# Altium PCB PCB1.PcbDoc
Units mil, origin at the board's own origin, x right, y up, seen from the top; angles counter-clockwise.
Board outline 4500 x 3000 mil, 4 copper layers (Top Layer, GND, Power Plane, Bottom Layer), stack 58 mil thick; 52 components, 53 nets, 188 pads, 2 vias.
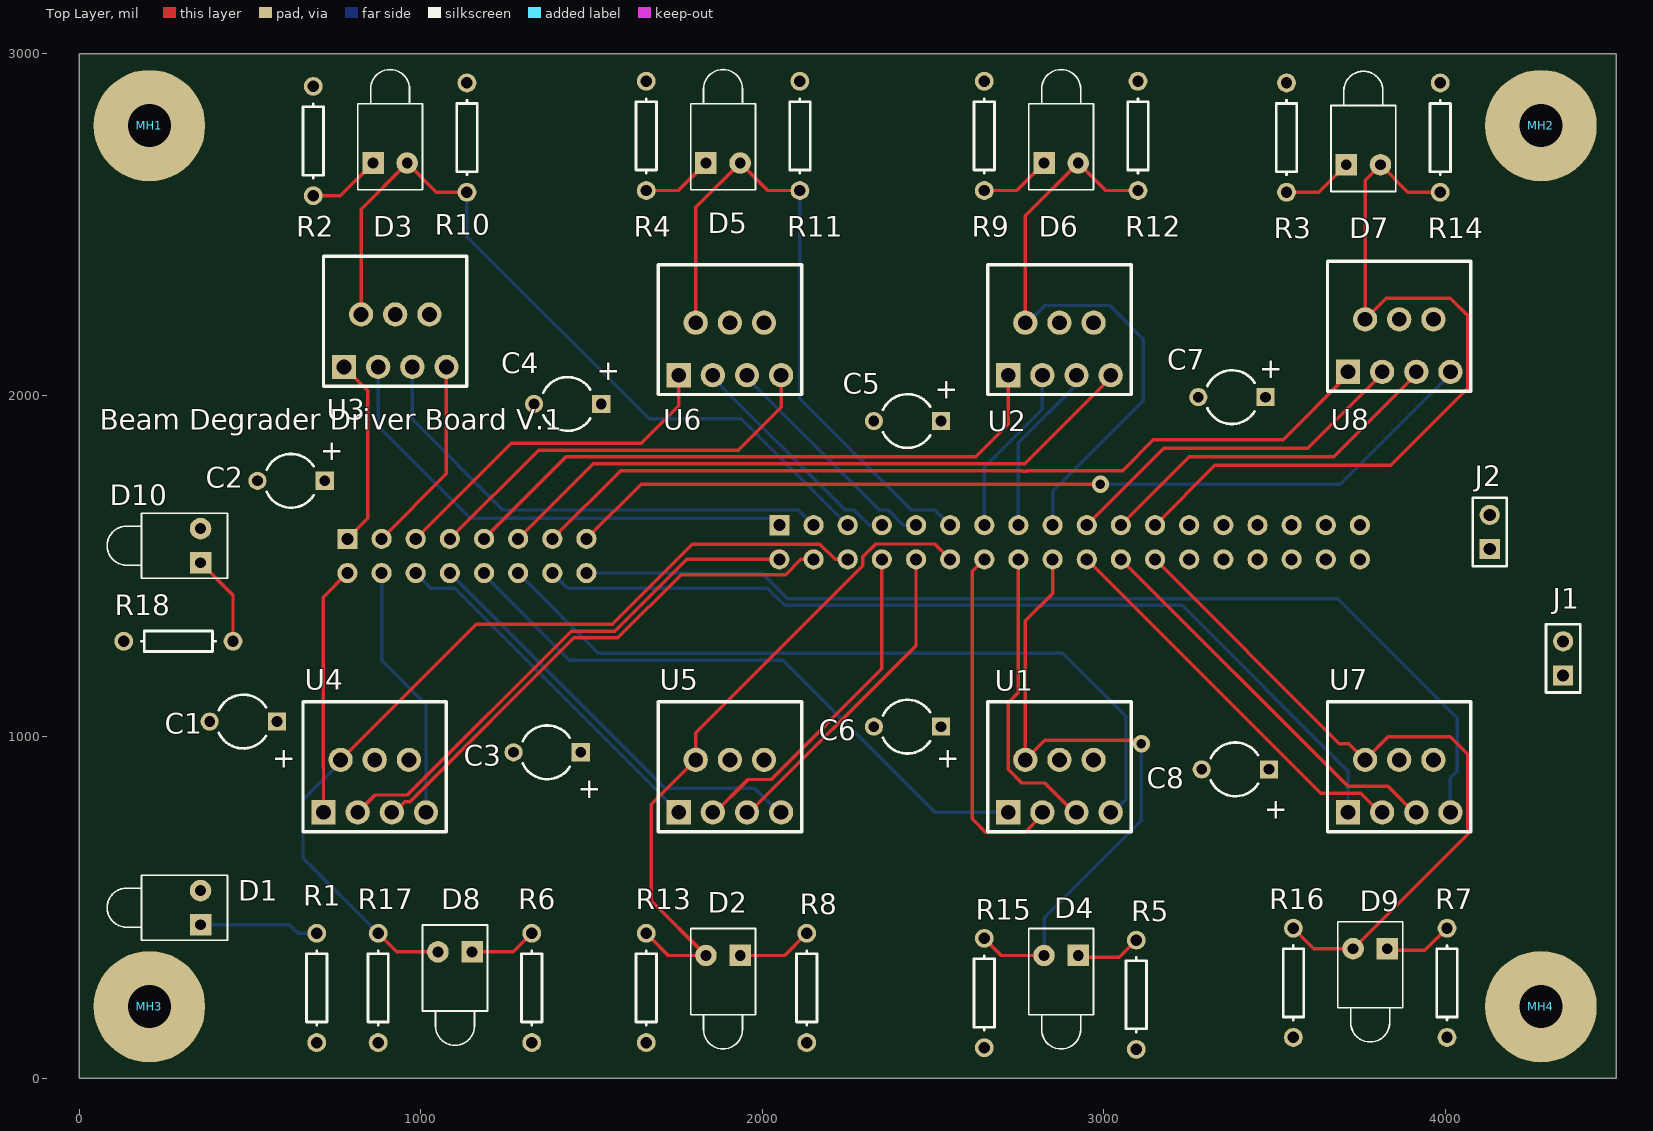
[diagram p0: Top Layer view]
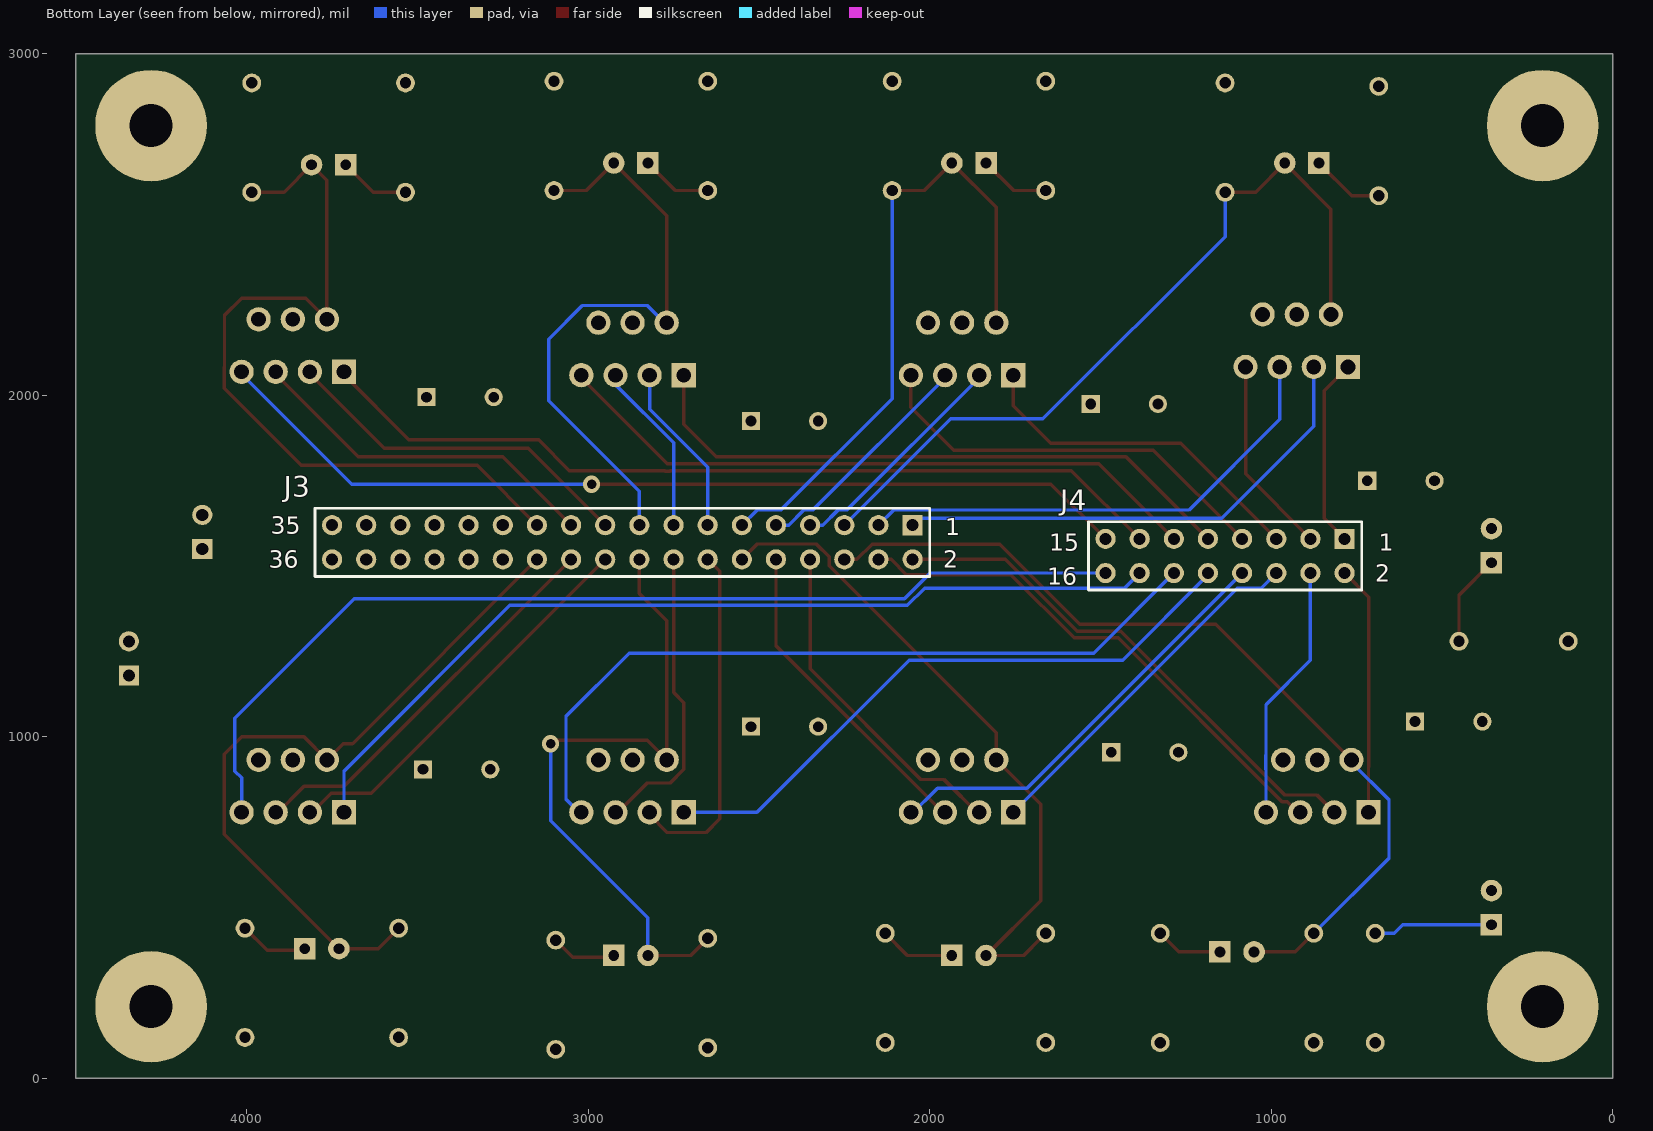
[diagram p1: Bottom Layer view, seen from below]
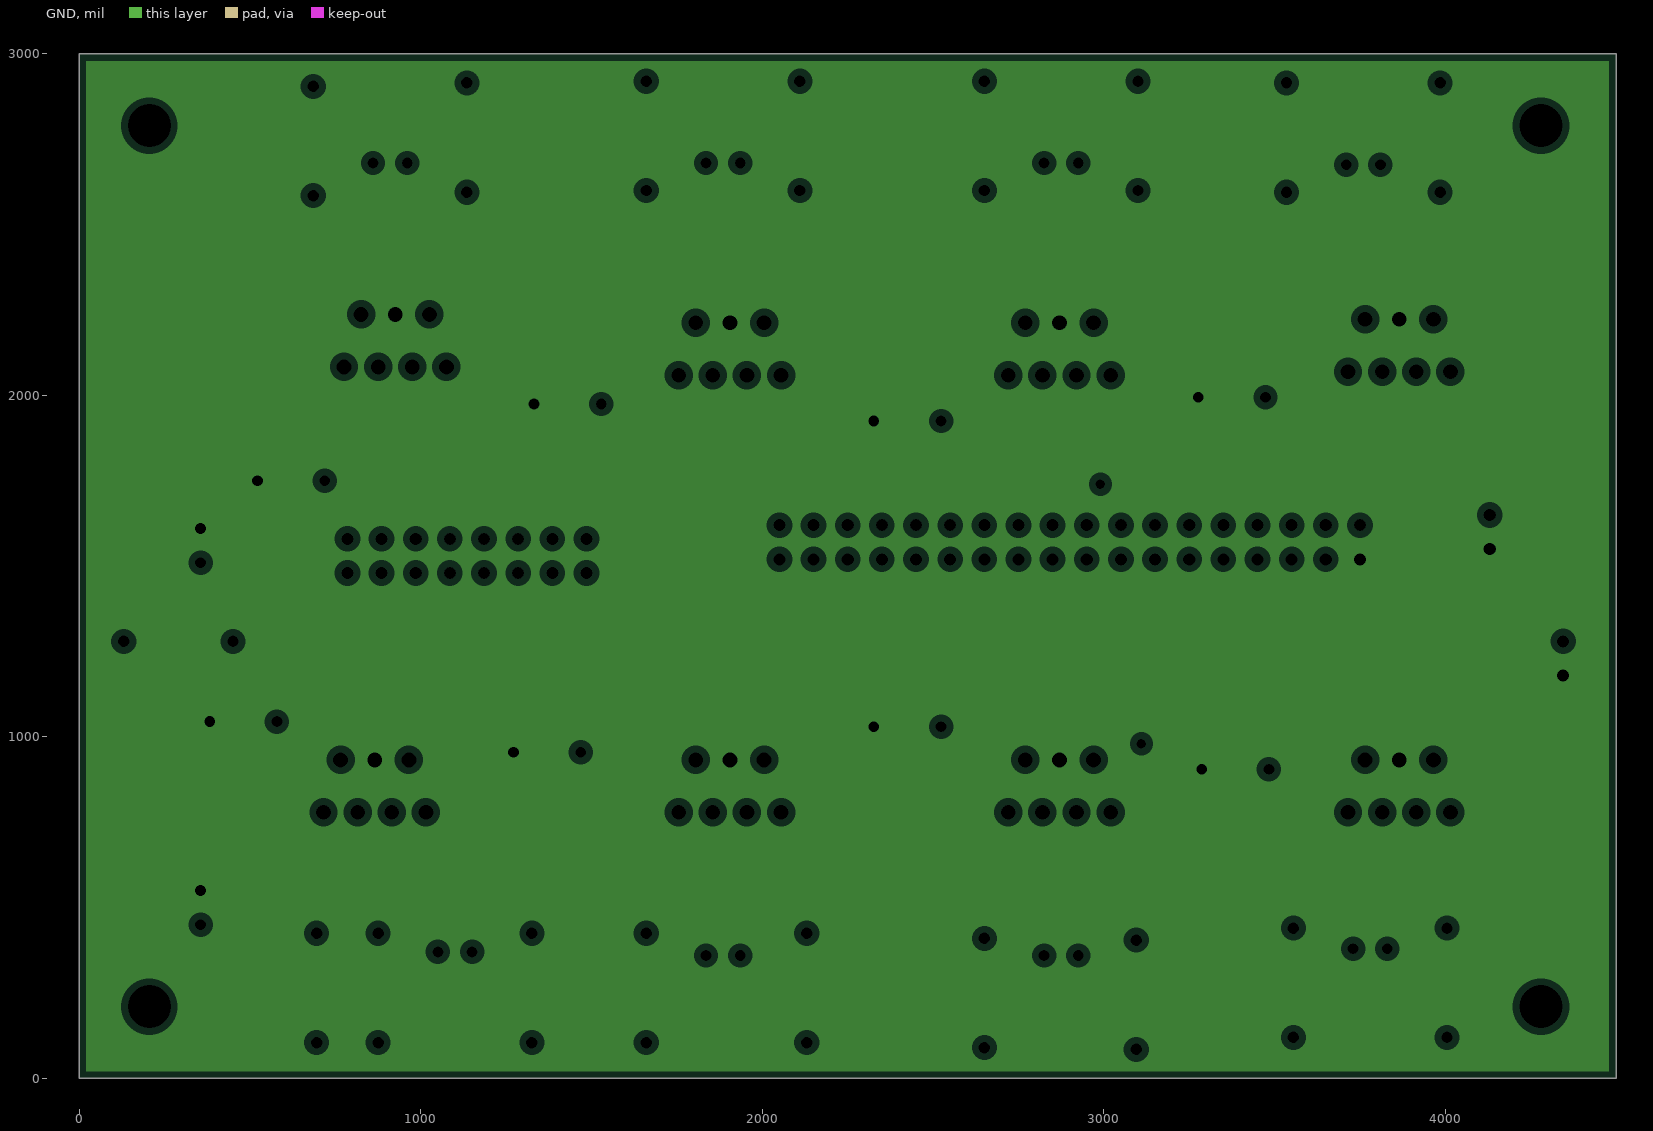
[diagram p2: GND, clearances drawn from the general rule]
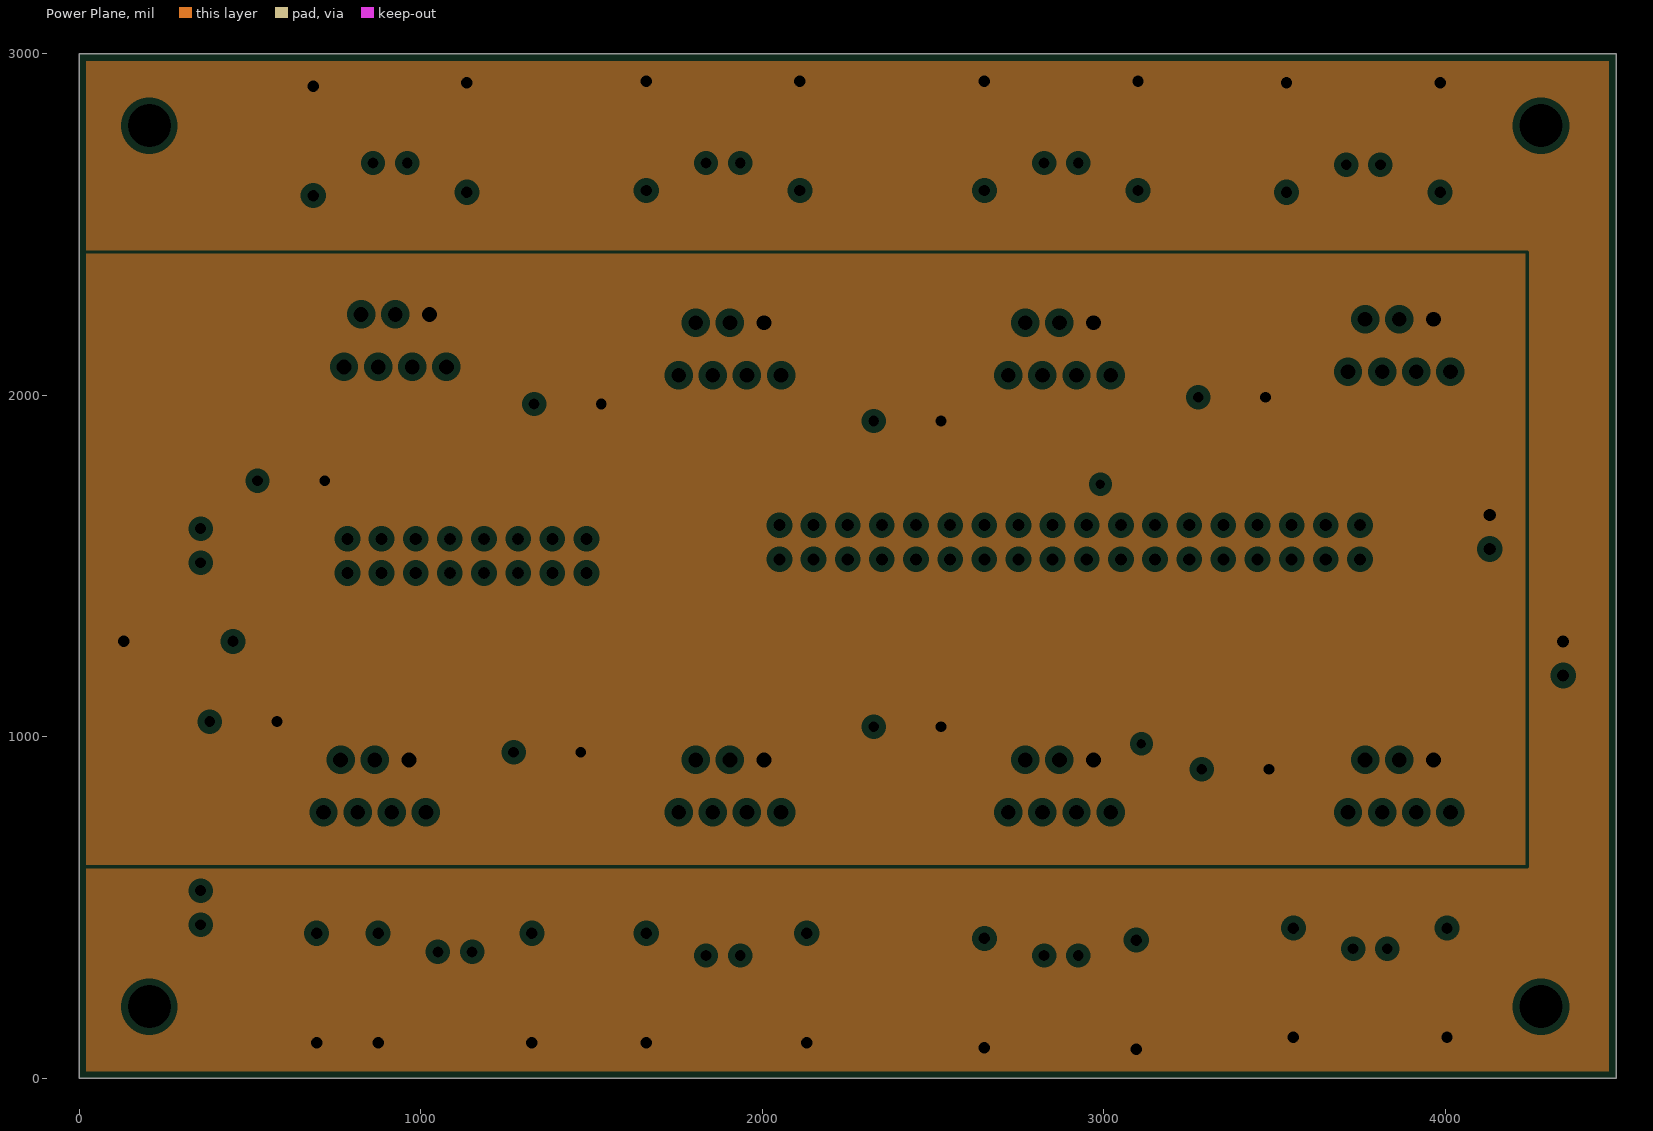
[diagram p3: Power Plane, clearances drawn from the general rule]

## Layer stack, top to bottom
Top Solder: solder mask 0.4, Solder Resist, Dk 3.5
Top Layer: signal copper 1.7
Dielectric 1: prepreg 11.9, FR-4, Dk 4.2
GND: plane copper 1.4, net GND
Dielectric 3: core 28, Dk 4.2
Power Plane: plane copper 1.4, net (Multiple Nets)
Dielectric 2: prepreg 11.9, Dk 4.2
Bottom Layer: signal copper 1.7
Bottom Solder: solder mask 0.4, Solder Resist, Dk 3.5

## Board outline
0,0 4500,0 4500,3000 0,3000

## Design rules (kind name [scope] priority, off if disabled: settings)
AcuteAngle [All] p1: minimum=1.20000000000000E+0002 checktracksonly=TRUE
Clearance [All] p1: gap=10
HoleSize [All] p1: absolutevalues=TRUE maxlimit=200 minlimit=1 maxpercent=80.000 minpercent=20.000
PlaneClearance [All] p1: clearance=20
PlaneConnect [All] p1: planeconnectstyle=Relief reliefexpansion=20 reliefentries=4 reliefconductorwidth=20 reliefairgap=10
PolygonConnect [All] p1: connectstyle=Relief reliefconductorwidth=10 reliefentries=4 polygonreliefangle="90 Angle" airgapwidth=10
RoutingVias [All] p1: holewidth=28 width=50 viastyle="Through Hole" minholewidth=28 minwidth=50 maxholewidth=28 maxwidth=50
SolderMaskExpansion [All] p1: expansion=4
Width [All] p1: maxlimit=10 minlimit=10 preferedwidth=10
27 further rules are at their usual default settings.

## Components (designator, comment, footprint, x,y, rotation, side; value= is the part's Value field where it differs from the comment)
C1 "Cap1" CAPR5-4X5 480,1045 r180 top
C2 "Cap1" CAPR5-4X5 620,1750 r180 top
C3 "Cap2" CAPR5-4X5 1370,955 r180 top
C4 "Cap2" CAPR5-4X5 1430,1975 r180 top
C5 "Cap2" CAPR5-4X5 2425,1925 r180 top
C6 "Cap2" CAPR5-4X5 2425,1030 r180 top
C7 "Cap1" CAPR5-4X5 3375,1995 r180 top
C8 "Cap1" CAPR5-4X5 3385,905 r180 top
D1 "GREEN LED" LED-1 355,500 r180 top
D2 "RED LED" LED-1 1885,360 r270 top
D3 "RED LED" LED-1 910,2680.61 r90 top
D4 "RED LED" LED-1 2875,360 r270 top
D5 "RED LED" LED-1 1885,2680.61 r90 top
D6 "RED LED" LED-1 2875,2680.61 r90 top
D7 "RED LED" LED-1 3760,2675.61 r90 top
D8 "RED LED" LED-1 1100,370.49 r270 top
D9 "RED LED" LED-1 3780,380 r270 top
D10 "GREEN LED" LED-1 355,1560 r180 top
J1 "3.3V PS" HDR1X2 4345,1180 r90 top
J2 "12V PS" HDR1X2 4130,1550 r90 top
J3 "Header 18X2" HDR2X18 2050,1620 r0 bottom
J4 "Header 8X2" HDR2X8 785,1580 r0 bottom
MH1 "4-40" MountHole4-40 205,2790 r0 top
MH2 "4-40" MountHole4-40 4280,2790 r0 top
MH3 "4-40" MountHole4-40 205,210 r0 top
MH4 "4-40" MountHole4-40 4280,210 r0 top
R1 "Res2" AXIAL-0.3 695,265 r270 top
R2 "Res2" AXIAL-0.3 685,2745 r90 top
R3 "Res2" AXIAL-0.3 3535,2755 r90 top
R4 "Res2" AXIAL-0.3 1660,2760 r90 top
R5 "Res2" AXIAL-0.3 3095,245 r270 top
R6 "Res2" AXIAL-0.3 1325,265 r270 top
R7 "Res2" AXIAL-0.3 4005,280 r270 top
R8 "Res2" AXIAL-0.3 2130,265 r270 top
R9 "Res2" AXIAL-0.3 2650,2760 r90 top
R10 "Res1" AXIAL-0.3 1135,2755 r90 top
R11 "Res1" AXIAL-0.3 2110,2760 r90 top
R12 "Res1" AXIAL-0.3 3100,2760 r90 top
R13 "Res1" AXIAL-0.3 1660,265 r270 top
R14 "Res1" AXIAL-0.3 3985,2755 r90 top
R15 "Res1" AXIAL-0.3 2650,250 r270 top
R16 "Res1" AXIAL-0.3 3555,280 r270 top
R17 "Res1" AXIAL-0.3 875,265 r270 top
R18 "Res3" AXIAL-0.3 290,1280 r180 top
U1 "TLE 5206-2S" "TLE 5206-2" 2660,722.83 r0 top
U2 "TLE 5206-2S" "TLE 5206-2" 2660,2002.83 r0 top
U3 "TLE 5206-2S" "TLE 5206-2" 715,2027.17 r0 top
U4 "TLE 5206-2S" "TLE 5206-2" 655,722.83 r0 top
U5 "TLE 5206-2S" "TLE 5206-2" 1695,722.83 r0 top
U6 "TLE 5206-2S" "TLE 5206-2" 1695,2002.83 r0 top
U7 "TLE 5206-2S" "TLE 5206-2" 3655,722.83 r0 top
U8 "TLE 5206-2S" "TLE 5206-2" 3655,2012.83 r0 top

## Footprints (in the part's own frame and the unit in brackets; to place one, negate y for a bottom-side part, rotate by r counter-clockwise, add the part's x,y. Pads: shape width x height; smd on the part's side, far side on the other; paste and mask are expansions set on the pad)
AXIAL-0.3 [mm] "Axial Device, Thru-Hole; 2 Leads; 0.3 in Pin Spacing"
  round 1.4 hole 0.85: 1(-4.064,0) 2(4.064,0)
  silkscreen extent -2.77,-0.76 2.77,0.76
CAPR5-4X5 [mm] "Capacitor; 2 Leads"
  rect 1.35x1.35 hole 0.8: 1(-2.5,0)
  round 1.35 hole 0.8: 2(2.5,0)
  silkscreen extent -1.69,-2 1.82,2
HDR1X2 [mm] "Connector; Header; 2 Position"
  rect 1.5x1.5 hole 0.9: 1(0,0)
  round 1.5 hole 0.9: 2(2.54,0)
  silkscreen extent -1.27,-1.27 3.81,1.27
HDR2X8 [mm] "Connector; Header; 8x2 Position"
  rect 1.5x1.5 hole 0.9: 1(0,0)
  round 1.5 hole 0.9: 2(0,2.54) 3(2.54,0) 4(2.54,2.54) 5(5.08,0) 6(5.08,2.54) 7(7.62,0) 8(7.62,2.54) 9(10.16,0) 10(10.16,2.54) 11(12.7,0) 12(12.7,2.54) 13(15.24,0) 14(15.24,2.54) 15(17.78,0) 16(17.78,2.54)
  silkscreen extent -1.27,-1.27 19.05,3.81
HDR2X18 [mm] "Connector; Header; 18x2 Position"
  rect 1.5x1.5 hole 0.9: 1(0,0)
  round 1.5 hole 0.9: 2(0,2.54) 3(2.54,0) 4(2.54,2.54) 5(5.08,0) 6(5.08,2.54) 7(7.62,0) 8(7.62,2.54) 9(10.16,0) 10(10.16,2.54) 11(12.7,0) 12(12.7,2.54) 13(15.24,0) 14(15.24,2.54) 15(17.78,0) 16(17.78,2.54) 17(20.32,0) 18(20.32,2.54) 19(22.86,0) 20(22.86,2.54) 21(25.4,0) 22(25.4,2.54) 23(27.94,0) 24(27.94,2.54) 25(30.48,0) 26(30.48,2.54) 27(33.02,0) 28(33.02,2.54) 29(35.56,0) 30(35.56,2.54) 31(38.1,0) 32(38.1,2.54) 33(40.64,0) 34(40.64,2.54) 35(43.18,0) 36(43.18,2.54)
  silkscreen extent -1.27,-1.27 44.45,3.81
LED-1 [mm] "LED; 2 Leads"
  rect 1.6x1.6 hole 0.8: 1(0,1.27)
  round 1.6 hole 0.8: 2(0,-1.27)
  silkscreen extent -2,-2.41 6.95,2.41
MountHole4-40 [mm]
  round 8.3 / inner round 3.7 / far side round 8.3 hole 3.2: 1(0,0)
"TLE 5206-2" [mm] "H-bridge bent legs"
  rect 1.8x1.8 hole 1.1: 1(1.524,1.434)
  round 1.8 hole 1.1: 2(2.794,5.334) 3(4.064,1.434) 4(5.334,5.334) 5(6.604,1.434) 6(7.874,5.334) 7(9.144,1.434)
  silkscreen extent 0,0 10.67,9.65

## Part data
C1 C2 C7 C8: library part Cap2, "Capacitor"
C3 C4 C5 C6: "Capacitor"
D1 D2 D3 D4 D5 D6 D7 D8 D9 D10: library part LED1, "Typical RED GaAs LED"
J1 J2: library part "Header 2", "Header, 2-Pin"
J3: "Header, 18-Pin, Dual row"
J4: "Header, 8-Pin, Dual row"
MH1 MH2 MH3 MH4: library part "Mounting Hole 4-40"
R1 R2 R3 R4 R5 R6 R7 R8 R9 R18: library part Res1, "Resistor"
R10 R11 R12 R13 R14 R15 R16 R17: "Resistor"
U1 U2 U3 U4 U5 U6 U7 U8: "Infineon TLE 5206-2S Hbridge"

## Via types
v1: diameter 50, hole 28, Top Layer to Bottom Layer, 2 vias

## Nets (pads, with @x,y where several pads share a name; then routed paths per layer and width w, separated by ;. In a path a pad name is that pad's centre, name@x,y a point inside that pad or via, vN(x,y) a via of type N, cw(c..) or ccw(c..) an arc to the next point about the centre after c; other vN are vias at no path point)
GND: C1.2 C2.2 C3.2 C4.2 C5.2 C6.2 C7.2 C8.2 D1.2 D10.2 J1.1 J2.1 J3.36 U1.4 U2.4 U3.4 U4.4 U5.4 U6.4 U7.4 U8.4
H1_EF: D3.2 J3.5 R10.1 U3.2 | length 2333.2
  Top Layer w10: U3.2@825,2230 U3.2 825,2545.61 D3.2 1045.61,2595 1120,2595 R10.1@1135,2610
  Bottom Layer w10: R10.1@1135,2610 R10.1 1135,2465 1668.43,1931.57 1938.43,1931.57 J3.5
H1_IN1: J3.1 U3.3 | length 1461.6
  Bottom Layer w10: U3.3@875,2076.46 875,1910 1145,1640 2030,1640 J3.1
H1_IN2: J3.3 U3.5 | length 1449.9
  Bottom Layer w10: U3.5@975,2076.46 975,1930 1240.47,1664.53 2105.47,1664.53 J3.3
H1_OUT1: J4.1 U3.1 | length 557.5
  Top Layer w10: U3.1 845,2013.62 845,1640 J4.1
H1_OUT2: J4.3 U3.7 | length 575.2
  Top Layer w10: J4.3 1075,1770 U3.7@1075,2076.46
H2_EF: D5.2 J3.11 R11.1 U6.2 | length 1954.6
  Top Layer w10: U6.2@1805,2205.67 U6.2 1805,2550.61 D5.2 2015.61,2600 2100,2600 R11.1@2110,2610
  Bottom Layer w10: R11.1@2110,2610 R11.1 2110,1990 2435.47,1664.53 2505.47,1664.53 J3.11
H2_IN1: J3.7 U6.3 | length 674
  Bottom Layer w10: U6.3@1855,2052.13 2242.6,1664.53 2268.44,1664.53 2312.97,1620 J3.7
H2_IN2: J3.9 U6.5 | length 674
  Bottom Layer w10: U6.5@1955,2052.13 2342.6,1664.53 2368.44,1664.53 2412.97,1620 J3.9
H2_OUT1: J4.5 U6.1 | length 1013.7
  Top Layer w10: J4.5 1265,1860 1645,1860 1755,1970 U6.1@1755,2052.13
H2_OUT2: J4.7 U6.7 | length 1216.6
  Top Layer w10: J4.7 1345,1840 1930,1840 2055,1965 U6.7@2055,2052.13
H3_EF: D6.2 J3.17 R12.1 U2.2 | length 1811.9
  Top Layer w10: U2.2@2770,2205.67 U2.2 2770,2525.61 D6.2 3005.61,2600 R12.1
  Bottom Layer w10: U2.2@2770,2205.67 2827.6,2263.27 3016.73,2263.27 3115,2165 3115,1985 2850,1720 J3.17
H3_IN1: J3.13 U2.3 | length 502.5
  Bottom Layer w10: J3.13 2650,1790 2820,1960 U2.3@2820,2052.13
H3_IN2: J3.15 U2.5 | length 502.5
  Bottom Layer w10: J3.15 2750,1861.72 2920,2031.72 U2.5@2920,2052.13
H3_OUT1: J4.9 U2.1 | length 1810.9
  Top Layer w10: J4.9 1425,1820 2625,1820 2720,1915 U2.1@2720,2052.13
H3_OUT2: J4.11 U2.7 | length 1930.6
  Top Layer w10: J4.11 1505,1800 2767.87,1800 U2.7@3020,2052.13
H4_EF: D7.2 J3.23 R14.1 U8.2 | length 2326
  Top Layer w10: J3.23 3325,1795 3840,1795 4065.43,2020.43 4065.43,2083.02 4065,2083.45 4065,2235 4015,2285 3827.17,2285 U8.2 3765,2630.61 D7.2 ; D7.2@3810.31,2675.3 3890.61,2595 3975,2595 R14.1@3985,2605
H4_IN1: J3.19 U8.3 | length 1048.6
  Top Layer w10: J3.19 3175,1845 3596.72,1845 U8.3@3815,2063.28
H4_IN2: J3.21 U8.5 | length 1048.1
  Top Layer w10: J3.21 3250,1820 3672.87,1820 U8.5@3915,2062.13
H4_OUT1: J4.13 U8.1 | length 2532.7
  Top Layer w10: J4.13 1585,1780 2759.59,1780 2761.66,1777.93 2774.09,1777.93 2776.16,1780 3055,1780 3145,1870 3525,1870 3715,2060 U8.1@3715,2062.13
H4_OUT2: J4.15 U8.7 | length 2729.7
  Top Layer w10: J4.15 1645,1740 v1(2990,1740)
  Bottom Layer w10: v1(2990,1740) 3692.87,1740 U8.7@4015,2062.13
H5_EF: D8.2 J3.6 R17.1 U4.2 | length 2607.2
  Top Layer w10: U4.2@765,925.67 U4.2 1162.17,1330 1560,1330 1794.53,1564.53 2168.44,1564.53 2212.97,1520 J3.6 ; R17.1 929.51,370.49 D8.2
  Bottom Layer w10: U4.2@765,925.67 655,815.67 655,645 R17.1
H5_IN1: J3.2 U4.3 | length 1549
  Top Layer w10: U4.3@815,772.13 U4.3 865.71,830 960,830 1440,1310 1568.28,1310 1778.28,1520 J3.2
H5_IN2: J3.4 U4.5 | length 1544.8
  Top Layer w10: U4.5@915,772.13 952.87,810 968.28,810 1448.28,1290 1576.57,1290 1762.04,1475.47 2068.44,1475.47 2112.97,1520 J3.4
H5_OUT1: J4.2 U4.1 | length 737.2
  Top Layer w10: U4.1@715,772.13 U4.1 715,911.51 714.57,911.94 714.57,1409.57 J4.2
H5_OUT2: J4.4 U4.7 | length 762.1
  Bottom Layer w10: J4.4 885,1225 1015,1095 1015,946.99 1015.43,946.56 1015.43,904.78 1015,904.35 U4.7 U4.7@1015,772.13
H6_EF: D2.2 J3.12 R13.1 U5.2 | length 1960.7
  Top Layer w10: R13.1@1675,410 1725,360 D2.2 1675,520 1675,802.83 U5.2 1805,1012.03 2294.53,1501.56 2294.53,1527.5 2332.03,1565 2505,1565 J3.12
H6_IN1: J3.8 U5.3 | length 992.6
  Top Layer w10: U5.3@1855,772.13 1958.11,875.24 2025.89,875.24 2350,1199.35 J3.8
H6_IN2: J3.10 U5.5 | length 952.9
  Top Layer w10: U5.5@1955,772.13 2450,1267.13 J3.10
H6_OUT1: J4.6 U5.1 | length 1074.5
  Bottom Layer w10: J4.6 1029.53,1435.47 1098.82,1435.47 U5.1 U5.1@1755,765
H6_OUT2: J4.8 U5.7 | length 1263.2
  Bottom Layer w10: J4.8 1715,850 1977.13,850 U5.7@2055,772.13
H7_EF: D4.2 J3.18 R15.1 U1.2 | length 1949.7
  Top Layer w10: R15.1@2650,395 2665,395 2700,360 2810,360 D4.2@2820.25,370.25 ; D4.2@2825,355 D4.2 ; J3.18 2850,1420 2770,1340 U1.2 2827.17,990 3100,990 v1(3110,980)
  Bottom Layer w10: D4.2 2825,470 3110,755 v1(3110,980) v1@3110,985 ; J3.18@2850,1495.47 J3.18
H7_IN1: J3.14 U1.3 | length 1017.7
  Top Layer w10: J3.14 2615,1485 2615,760 2655,720 2767.87,720 U1.3@2820,772.13
H7_IN2: J3.16 U1.5 | length 883.2
  Top Layer w10: J3.16 2750,1130 2719.57,1099.57 2719.57,904.78 2759.35,865 2827.13,865 U1.5@2920,772.13
H7_OUT1: J4.10 U1.1 | length 1831.1
  Bottom Layer w10: J4.10 1185,1475 1435,1225 2060,1225 2505.71,779.29 2712.83,779.29 U1.1@2720,772.13
H7_OUT2: J4.12 U1.7 | length 2260.5
  Bottom Layer w10: J4.12 1520,1245 2880,1245 3065,1060 3065,817.13 U1.7@3020,772.13
H8_EF: D9.2 J3.24 R16.1 U7.2 | length 2115.7
  Top Layer w10: J3.24 3690,980 3717.83,980 U7.2 3832.17,1000 4015,1000 4065.43,949.57 4065.43,715.43 D9.2 3615,380 R16.1
H8_IN1: J3.20 U7.3 | length 1174.8
  Top Layer w10: J3.20 3635,835 3752.13,835 U7.3@3815,772.13
H8_IN2: J3.22 U7.5 | length 1174.8
  Top Layer w10: J3.22 3715,855 3832.13,855 U7.5@3915,772.13
H8_OUT1: J4.14 U7.1 | length 2698.1
  Bottom Layer w10: J4.14 1429.53,1435.47 2014.99,1435.47 2065.46,1385 3230,1385 3715,900 U7.1 U7.1@3715,772.13
H8_OUT2: J4.16 U7.7 | length 3017.2
  Bottom Layer w10: J4.16 1998.74,1480 2073.74,1405 3685,1405 4035,1055 4035,900 4015,880 U7.7 U7.7@4015,772.13
NetD1_1: D1.1 R1.1 | length 354.5
  Bottom Layer w10: D1.1@355,440 365,450 615,450 640,425 R1.1
NetD2_1: D2.1 R8.1 | length 225.9
  Top Layer w10: D2.1@1935,350.49 1944.51,360 2065,360 R8.1
NetD3_1: D3.1 R2.1 | length 214.6
  Top Layer w10: R2.1 764.39,2585 D3.1
NetD4_1: D4.1 R5.1 | length 184.5
  Top Layer w10: D4.1@2925,355 3045,355 3080,390 R5.1@3095,390
NetD5_1: D5.1 R4.1 | length 212.5
  Top Layer w10: R4.1@1660,2610 1670,2600 1754.39,2600 D5.1
NetD6_1: D6.1 R9.1 | length 202.5
  Top Layer w10: R9.1@2660,2610 2670,2600 2744.39,2600 D6.1
NetD7_1: D7.1 R3.1 | length 212.5
  Top Layer w10: R3.1@3535,2605 3545,2595 3629.39,2595 D7.1
NetD8_1: D8.1 R6.1 | length 193.4
  Top Layer w10: D8.1 1270.49,370.49 1315,415 R6.1@1325,415
NetD9_1: D9.1 R7.1 | length 201.9
  Top Layer w10: D9.1@3830,375 3940,375 R7.1
NetD10_1: D10.1 R18.1 | length 273.5
  Top Layer w10: D10.1 450,1415 450,1290 R18.1@440,1280
"VCC 3.3V": J1.2 R1.2 R2.2 R3.2 R4.2 R5.2 R6.2 R7.2 R8.2 R9.2 R10.2 R11.2 R12.2 R13.2 R14.2 R15.2 R16.2 R17.2
"VCC 12V": C1.1 C2.1 C3.1 C4.1 C5.1 C6.1 C7.1 C8.1 J2.2 R18.2 U1.6 U2.6 U3.6 U4.6 U5.6 U6.6 U7.6 U8.6
pads on no net: J3.25 J3.26 J3.27 J3.28 J3.29 J3.30 J3.31 J3.32 J3.33 J3.34 J3.35 MH1.1 MH2.1 MH3.1 MH4.1

## Polygon pours and split planes (outlines as drawn)
GND on GND (split plane): 4479.9,20.1 20.1,20.1 20.1,2979.9 4479.9,2979.9
"VCC 3.3V" on Power Plane (split plane): 4479.9,20.1 20.1,20.1 20.1,614.9 4240,614.9 4241.95,615.29 4243.6,616.4 4244.71,618.05 4245.1,620 4245.1,2420 4244.71,2421.95 4243.6,2423.6 4241.95,2424.71 4240,2425.1 20.1,2425.1 20.1,2979.9 4479.9,2979.9
"VCC 12V" on Power Plane (split plane): 4234.9,625.1 20.1,625.1 20.1,2414.9 4234.9,2414.9

## Other copper
Power Plane (plane layer: these items are gaps in the copper):
  lines w10: -10,620 4240,620 4240,2420 15,2420

## Silkscreen, mask and mechanical layers (free items; w line width, h text height)
Top Overlay:
  text "+" at 3455,2050 h60
  text "+" at 1515,2045 h60
  text "+" at 2505,1990 h60
  text "Beam Degrader Driver Board V.1" at 60,1900 h60
  text "+" at 705,1810 h60
  text "+" at 565,910 h60
  text "+" at 2510,910 h60
  text "+" at 1460,820 h60
  text "+" at 3470,760 h60
Mechanical 1:
  the board outline again, w10

## Text inside footprints (layer, text, board x,y; h text height)
J3: Bottom Overlay "2" at 1960,1495 h50; Bottom Overlay "1" at 1955,1590 h50; Bottom Overlay "35" at 3930,1595 h50; Bottom Overlay "36" at 3935,1495 h50
J4: Bottom Overlay "16" at 1655,1445 h50; Bottom Overlay "15" at 1650,1545 h50; Bottom Overlay "1" at 685,1545 h50; Bottom Overlay "2" at 695,1455 h50